# EAGLE board expansion-original (EAGLE 9.6.2)
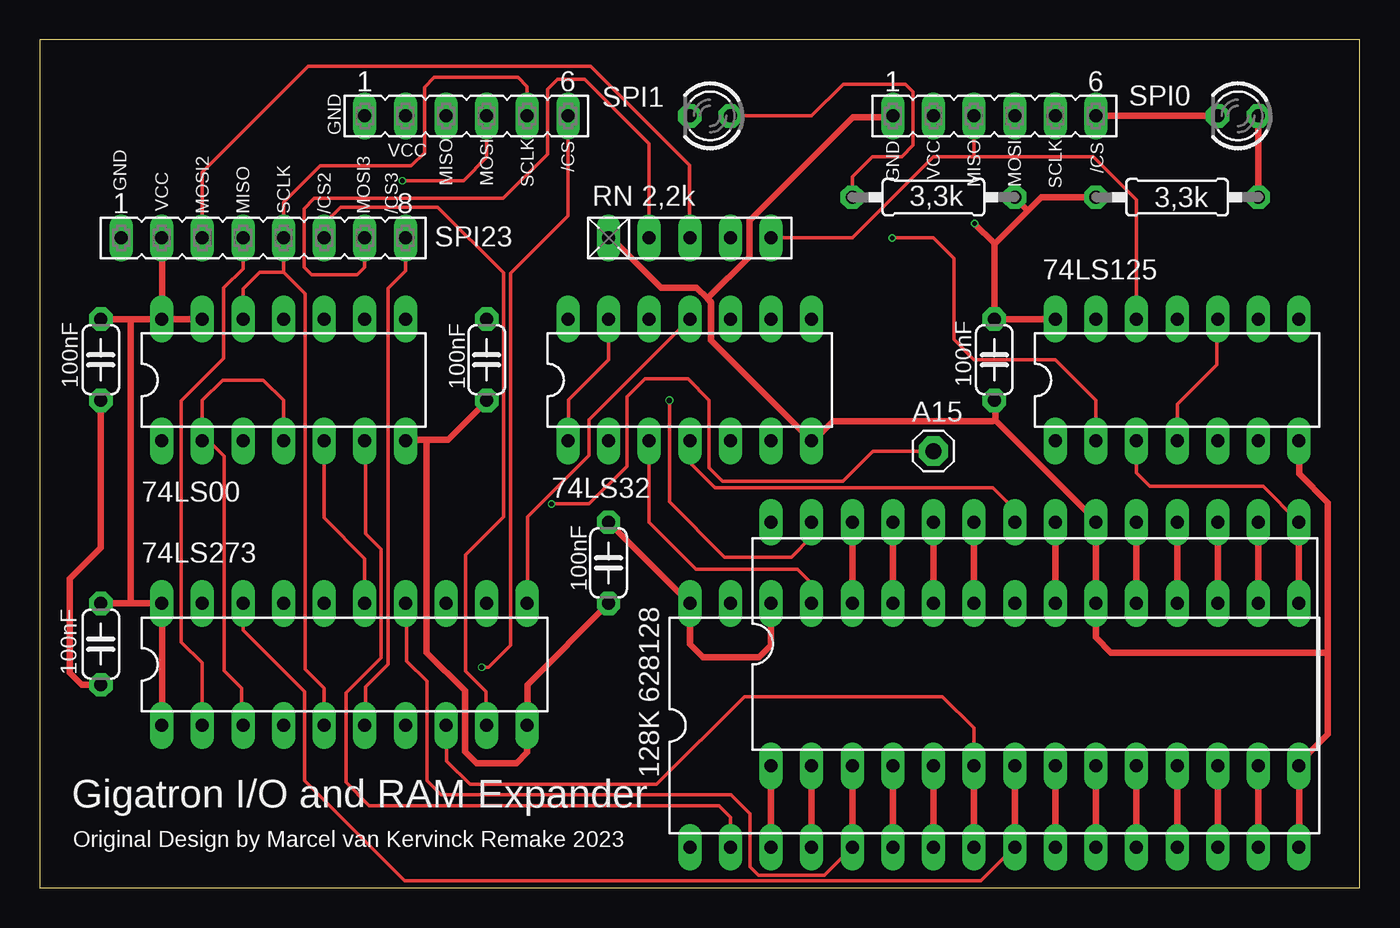
[diagram p0: board, top side]
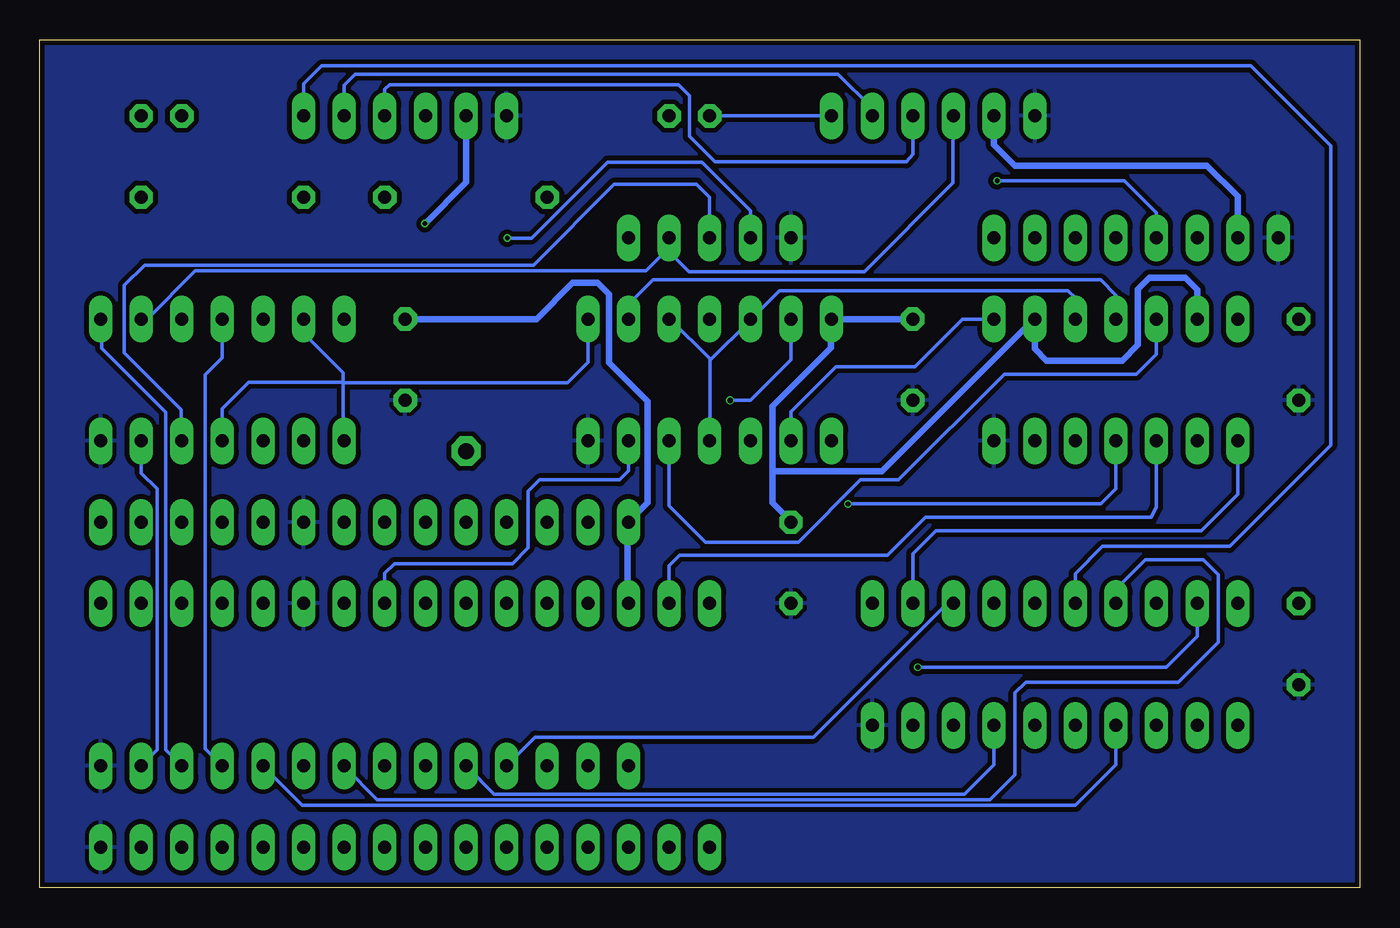
[diagram p1: board, bottom side, seen from below]

Size 82.53 x 53.01 mm. Coordinates in mm from the lower left corner, seen from the top.
Outline: 0,0 82.53,0 82.53,53.01 0,53.01 0,0
Copper layers (1*16): Top 0.035mm / dielectric 1.6mm / Bottom 0.035mm
Design rules "jlcpcb-2layers *": minimum track width 8mil, minimum drill 0.3mm, track to track 6mil, track to pad 6mil, pad to pad 6mil, via to via 6mil, smd to smd 5mil, copper to edge 0.2mm, drill to drill 6mil, minimum pad ring 10mil, minimum via ring 3mil, stop-mask expansion 4mil, vias tented up to drill 0mil, thermal gap 10mil
Net classes: 1 power: width 0.406 mm, clearance 0.203 mm

## Footprints (pad centres in the part's own frame; a part is rotated, then mirrored left to right if it is on the bottom)
1X01 = drill 1.016 octagon: 1 0,0
C050-024X044 = drill 0.813 octagon: 1 -2.54,0; 2 2.54,0
DIL14 = drill 0.813 long: 1 -7.62,-3.81; 2 -5.08,-3.81; 3 -2.54,-3.81; 4 0,-3.81; 5 2.54,-3.81; 6 5.08,-3.81; 7 7.62,-3.81; 8 7.62,3.81; 9 5.08,3.81; 10 2.54,3.81; 11 0,3.81; 12 -2.54,3.81; 13 -5.08,3.81; 14 -7.62,3.81
DIL20 = drill 0.813 long: 1 -11.43,-3.81; 2 -8.89,-3.81; 3 -6.35,-3.81; 4 -3.81,-3.81; 5 -1.27,-3.81; 6 1.27,-3.81; 7 3.81,-3.81; 8 6.35,-3.81; 9 8.89,-3.81; 10 11.43,-3.81; 11 11.43,3.81; 12 8.89,3.81; 13 6.35,3.81; 14 3.81,3.81; 15 1.27,3.81; 16 -1.27,3.81; 17 -3.81,3.81; 18 -6.35,3.81; 19 -8.89,3.81; 20 -11.43,3.81
DIL32 = drill 0.813 long: 1 -19.05,-7.62; 2 -16.51,-7.62; 3 -13.97,-7.62; 4 -11.43,-7.62; 5 -8.89,-7.62; 6 -6.35,-7.62; 7 -3.81,-7.62; 8 -1.27,-7.62; 9 1.27,-7.62; 10 3.81,-7.62; 11 6.35,-7.62; 12 8.89,-7.62; 13 11.43,-7.62; 14 13.97,-7.62; 15 16.51,-7.62; 16 19.05,-7.62; 17 19.05,7.62; 18 16.51,7.62; 19 13.97,7.62; 20 11.43,7.62; 21 8.89,7.62; 22 6.35,7.62; 23 3.81,7.62; 24 1.27,7.62; 25 -1.27,7.62; 26 -3.81,7.62; 27 -6.35,7.62; 28 -8.89,7.62; 29 -11.43,7.62; 30 -13.97,7.62; 31 -16.51,7.62; 32 -19.05,7.62
DIL28-6 = drill 0.813 long: 1 -16.51,-7.62; 2 -13.97,-7.62; 3 -11.43,-7.62; 4 -8.89,-7.62; 5 -6.35,-7.62; 6 -3.81,-7.62; 7 -1.27,-7.62; 8 1.27,-7.62; 9 3.81,-7.62; 10 6.35,-7.62; 11 8.89,-7.62; 12 11.43,-7.62; 13 13.97,-7.62; 14 16.51,-7.62; 15 16.51,7.62; 16 13.97,7.62; 17 11.43,7.62; 18 8.89,7.62; 19 6.35,7.62; 20 3.81,7.62; 21 1.27,7.62; 22 -1.27,7.62; 23 -3.81,7.62; 24 -6.35,7.62; 25 -8.89,7.62; 26 -11.43,7.62; 27 -13.97,7.62; 28 -16.51,7.62
LED3MM = drill 0.813 octagon: A -1.27,0; K 1.27,0
0207/10 = drill 0.813 octagon: 1 -5.08,0; 2 5.08,0
RN-5 = drill 0.813 long: 1 -5.08,0; 2 -2.54,0; 3 0,0; 4 2.54,0; 5 5.08,0
FE06 = drill 0.813 long: 1 -6.35,0; 2 -3.81,0; 3 -1.27,0; 4 1.27,0; 5 3.81,0; 6 6.35,0
FE08 = drill 0.813 long: 1 -8.89,0; 2 -6.35,0; 3 -3.81,0; 4 -1.27,0; 5 1.27,0; 6 3.81,0; 7 6.35,0; 8 8.89,0

## Placement (x,y rotation side)
A15  A15  [1X01]  55.88,27.3 0 top
C1  100nF  [C050-024X044]  3.81,15.24 270 top
C2  100nF  [C050-024X044]  3.81,33.02 270 top
C3  100nF  [C050-024X044]  27.94,33.02 270 top
C4  100nF  [C050-024X044]  59.69,33.02 270 top
C5  100nF  [C050-024X044]  35.56,20.32 270 top
IC1  74LS00N  [DIL14]  15.24,31.75 0 top
IC2  74LS125N  [DIL14]  71.12,31.75 0 top
IC3  74LS32N  [DIL14]  40.64,31.75 0 top
IC4  74HC273N  [DIL20]  19.05,13.97 0 top
IC5  628128  [DIL32]  59.69,10.16 0 top
IC6  adapter  [DIL28-6]  62.23,15.24 0 top
LED1  green  [LED3MM]  74.93,48.26 180 top
LED2  green  [LED3MM]  41.91,48.26 180 top
R1  3,3k  [0207/10]  71.12,43.18 180 top
R2  3,3k  [0207/10]  55.88,43.18 0 top
RN1  2,2k  [RN-5]  40.64,40.64 0 top
SPI0  SPI0  [FE06]  59.69,48.26 0 top
SPI1  SPI1  [FE06]  26.67,48.26 0 top
SPI23  SPI23  [FE08]  13.97,40.64 0 top

## Library data of the parts
A15 = pinhead
C1-C5 = rcl; SPICEPREFIX: C
IC1-IC4 = 74xx-eu
IC5 IC6 = memory-hitachi; OC_FARNELL: unknown; OC_NEWARK: unknown
LED1 LED2 = led
R1 R2 = rcl; SPICEPREFIX: R
RN1 = resistor-net; OC_FARNELL: unknown; OC_NEWARK: unknown
SPI0 SPI1 SPI23 = con-lsta; OC_FARNELL: unknown; OC_NEWARK: unknown

## Nets
/OE: IC1.10 IC3.4 IC3.10 IC3.12 IC6.22
/OE_PORT: IC2.1 IC2.4 IC2.10 IC2.13 IC3.8
/OE_RAM: IC3.6 IC5.24
/SS0: IC4.16 LED1.K SPI0.6
/SS1: IC4.19 LED2.K SPI1.6
/SS2: IC4.9 SPI23.6
/SS3: IC4.6 SPI23.8
/WR: IC3.1 IC3.13 IC6.27
/WR_PORT: IC3.11 IC4.11
/WR_RAM: IC3.3 IC5.29
A0: IC4.4 IC5.12 IC6.10
A1: IC5.11 IC6.9
A2: IC4.17 IC5.10 IC6.8
A3: IC4.18 IC5.9 IC6.7
A4: IC4.8 IC5.8 IC6.6
A5: IC4.7 IC5.7 IC6.5
A6: IC4.13 IC5.6 IC6.4
A7: IC4.14 IC5.5 IC6.3
A8: IC5.27 IC6.25
A9: IC5.26 IC6.24
A10: IC5.23 IC6.21
A11: IC5.25 IC6.23
A12: IC5.4 IC6.2
A13: IC5.28 IC6.26
A14: IC5.3 IC6.1
A15: A15.1 IC1.2 IC1.4 IC4.3
A15_RAM: IC1.3 IC5.31
A16_RAM: IC1.6 IC5.2
B0: IC1.1 IC4.12
B1: IC1.5 IC4.15
D0: IC2.11 IC5.13 IC6.11
D1: IC2.8 IC5.14 IC6.12
D2: IC2.6 IC5.15 IC6.13
D3: IC2.3 IC5.17 IC6.15
D4: IC5.18 IC6.16
D5: IC5.19 IC6.17
D6: IC5.20 IC6.18
D7: IC5.21 IC6.19
GND [power]: C1.2 C2.2 C3.2 C4.2 C5.2 IC1.7 IC2.7 IC3.7 IC4.10 IC5.16 IC5.22 IC6.14 IC6.20 RN1.1 SPI0.1 SPI1.1 SPI23.1
MISO0: IC2.12 RN1.5 SPI0.3
MISO1: IC2.9 RN1.4 SPI1.3
MISO2: IC2.5 RN1.3 SPI23.3
MISO3: IC2.2 RN1.2 SPI23.7
MOSI: IC4.2 SPI0.4 SPI1.4 SPI23.4
N$1: IC1.8 IC3.2
N$2: LED1.A R1.1
N$3: IC1.11 IC3.9
N$4: LED2.A R2.1
SCLK: IC1.12 IC3.5 IC4.5 SPI0.5 SPI1.5 SPI23.5
VCC [power]: C1.1 C2.1 C3.1 C4.1 C5.1 IC1.9 IC1.13 IC1.14 IC2.14 IC3.14 IC4.1 IC4.20 IC5.30 IC5.32 IC6.28 R1.2 R2.2 SPI0.2 SPI1.2 SPI23.2

## Tracks (layer width: path | path; a pad name or v marks a point on that pad's centre or on a via)
/OE
  Top 0.203: IC6.22 60.96,23.65 59.61,25 42.23,25 40.64,26.59 IC3.4
  Bottom 0.203: IC1.10 17.78,36.88 18.24,37.34 36.27,37.34 38.05,35.56 IC3.12 38.14,35.47 40.63,32.98 | 40.63,32.98 40.63,28 IC3.4 | IC3.10 43.12,35.56 40.63,33.07 40.63,32.98
/OE_PORT
  Top 0.203: IC2.10 73.61,35.56 73.61,32.72 71.12,30.23 IC2.4
  Bottom 0.203: 63.56,31.6 63.56,32.21 66.04,34.68 IC2.13 | 63.56,31.6 63.56,31.57 | 63.56,31.57 63.56,28 IC2.1 | 63.56,31.57 49.55,31.57 48.26,32.86 IC3.8 | IC2.4 71.12,29.94 69.46,31.6 63.56,31.6
/OE_RAM
  Bottom 0.203: IC5.24 60.96,19.67 60.36,20.28 52.98,20.28 51.99,21.27 51.99,24.8 51.28,25.5 46.29,25.5 45.72,26.07 IC3.6
/SS0
  Top 0.406: LED1.K SPI0.6
  Bottom 0.203: IC4.16 17.78,19.65 16.08,21.35 8.12,21.35 1.8,27.67 1.8,46.41 6.79,51.4 64.9,51.4 66.04,50.26 SPI0.6
/SS1  (via drill 0.3)
  Top 0.203: v27.63,13.79 28.05,13.79 29.43,15.16 29.43,38.44 33.02,42.03 SPI1.6
  Bottom 0.203: IC4.19 10.16,15.73 12.1,13.79 v27.63,13.79 | SPI1.6 LED2.K
/SS2
  Top 0.203: SPI23.6 17.78,41.54 18.8,42.56 24.88,42.56 28.98,38.46 28.98,23.2 26.62,20.84 26.62,13.55 27.91,12.26 27.91,10.22 IC4.9
/SS3
  Top 0.203: SPI23.8 22.86,38.58 21.78,37.5 21.78,13.99 20.36,12.57 20.36,10.22 IC4.6
/WR  (via drill 0.35)
  Top 0.203: IC3.13 35.56,33.02 33.07,30.53 33.07,28 IC3.1 | IC6.27 48.26,21.95 46.99,20.68 42.82,20.68 39.37,24.13 v39.37,30.48
  Bottom 0.203: IC3.13 35.56,33.02 38.1,30.48 v39.37,30.48
/WR_PORT
  Top 0.203: IC4.11 30.49,17.78 30.49,23.2 34.33,27.05 34.33,29.27 40.63,35.56 IC3.11
/WR_RAM
  Top 0.203: IC5.29 48.26,19.05 47.39,19.92 41.04,19.92 38.1,22.86 IC3.3
A0
  Top 0.406: IC6.10 IC5.12
  Bottom 0.203: IC4.4 15.24,7.68 17.77,5.16 66.14,5.16 68.54,7.56 IC6.10
A1
  Top 0.406: IC6.9 IC5.11
A2
  Top 0.406: IC6.8 IC5.10
  Bottom 0.203: IC4.17 15.24,18.66 13.39,20.51 9.78,20.51 8.84,19.57 8.84,15.35 11.33,12.87 20.87,12.87 21.55,12.19 21.55,7.07 23.11,5.51 61.43,5.51 63.48,7.56 IC6.8
A3
  Top 0.203: IC4.18 12.71,17.78 12.71,16.09 16.55,12.25 16.55,6.69 22.8,0.45 58.85,0.45 60.9,2.49 IC5.9
  Top 0.406: IC6.7 60.96,2.55 60.9,2.49
A4
  Top 0.203: IC6.6 58.42,9.99 56.45,11.96 44.07,11.96 38.57,6.46 26.89,6.46 25.43,7.92 25.43,10.13 IC4.8
  Top 0.406: IC6.6 IC5.8
A5
  Top 0.406: IC6.5 IC5.7
  Bottom 0.203: IC4.7 22.86,7.71 24.7,5.87 54.14,5.87 55.83,7.56 IC6.5
A6
  Top 0.406: IC6.4 IC5.6
  Bottom 0.203: IC4.13 25.78,17.78 34.14,9.42 51.56,9.42 53.34,7.64 IC6.4
A7
  Top 0.203: IC4.14 22.94,17.78 22.94,14.17 24.2,12.91 24.2,6.69 25.07,5.81 43.22,5.81 44.4,4.63 44.4,1.33 44.93,0.8 49.07,0.8 50.76,2.49 IC5.5
  Top 0.406: IC6.3 IC5.5
A8
  Top 0.406: IC6.25 IC5.27
A9
  Top 0.406: IC6.24 IC5.26
A10
  Top 0.406: IC6.21 IC5.23
A11
  Top 0.406: IC6.23 IC5.25
A12
  Top 0.406: IC6.2 IC5.4
A13
  Top 0.406: IC6.26 IC5.28
A14
  Top 0.406: IC6.1 IC5.3
A15  (via drill 0.3)
  Top 0.203: IC4.3 12.62,10.22 12.62,12.47 11.52,13.58 11.52,26.98 10.58,27.91 IC1.2 10.16,30.48 11.43,31.75 13.97,31.75 15.24,30.48 IC1.4 | v32,24 34.34,24 36.71,26.37 36.71,30.69 37.85,31.84 40.52,31.84 41.85,30.5 41.85,26.26 42.69,25.42 50.23,25.42 52.09,27.29 55.83,27.29 A15.1
  Bottom 0.203: v32,24 16.19,24 15.24,24.95 IC1.4
A15_RAM
  Bottom 0.203: IC5.31 43.18,20.15 42.54,20.79 29.53,20.79 27.15,23.17 13.02,23.17 12.7,23.81 IC1.3
A16_RAM
  Top 0.203: IC5.2 43.18,4.42 42.46,5.14 20.59,5.14 19.13,6.6 19.13,12.2 21.34,14.4 21.34,21.16 20.36,22.14 20.36,27.91 IC1.6
B0
  Bottom 0.203: IC4.12 27.94,20.89 26.49,22.34 9.89,22.34 7.62,24.61 IC1.1
B1
  Top 0.203: IC1.5 17.78,23.13 20.32,20.59 IC4.15
D0
  Top 0.406: IC6.11 IC5.13
  Bottom 0.203: IC2.11 71.12,33.15 72.19,32.09 72.19,8.71 71.12,7.64 IC6.11
D1
  Top 0.406: IC6.12 IC5.14
  Bottom 0.203: IC2.8 78.68,35.56 78.68,33.74 74.68,29.74 74.68,8.62 73.7,7.64 IC6.12
D2
  Top 0.406: IC6.13 IC5.15
  Bottom 0.203: IC2.6 76.19,27.91 76.19,25.93 75.21,24.96 75.21,8.62 76.19,7.64 IC6.13
D3
  Top 0.203: IC2.3 68.58,25.94 69.42,25.1 76.51,25.1 78.68,22.94 IC6.15
  Top 0.406: IC6.15 IC5.17
D4
  Top 0.406: IC6.16 IC5.18
D5
  Top 0.406: IC6.17 IC5.19
D6
  Top 0.406: IC6.18 IC5.20
D7
  Top 0.406: IC6.19 IC5.21
GND
  Top 0.406: C5.2 30.49,12.71 30.49,10.22 IC4.10 30.48,8.46 29.81,7.79 27.31,7.79 26.58,8.52 26.58,12.31 24.18,14.71 24.18,28 | 24.18,28 25.51,28 27.91,30.4 C3.2 | 24.18,28 22.94,28 IC1.7 | C1.2 2.61,12.7 1.87,13.44 1.87,19.34 3.81,21.27 C2.2 | IC5.16 78.77,2.58 78.77,7.56 IC6.14 78.77,7.82 80.56,9.61 80.56,14.71 | 80.56,14.71 80.56,24.09 78.77,25.88 78.77,27.91 IC2.7 | 59.74,29.25 59.74,30.4 C4.2 | 59.74,29.25 65.96,23.02 IC6.20 66.05,22.85 66.05,17.78 IC5.22 66.04,15.66 66.99,14.71 80.56,14.71 | 41.74,36.85 41.96,36.63 41.96,34.23 48.18,28 IC3.7 48.45,28 49.61,29.16 59.56,29.16 59.74,29.25 | 41.74,36.85 41.07,37.52 38.85,37.52 35.74,40.63 35.56,40.63 RN1.1 | 41.74,36.85 44.36,39.47 44.36,41.69 50.85,48.18 53.34,48.18 SPI0.1
  pour Bottom (isolate 0.305): 0,53.34 0,0 82.55,0 82.55,53.34
MISO0
  Top 0.203: RN1.5 50.8,40.64 55.88,45.72 58.42,45.72 | 58.42,45.72 65.88,45.72 68.58,43.02 IC2.12 | SPI0.3 58.42,45.72
MISO1
  Bottom 0.203: SPI1.3 25.43,48.18 25.43,44.07 30.96,38.53 41.94,38.53 43.18,39.78 RN1.4 43.18,40.02 44.62,38.58 72.81,38.58 75.83,35.56 IC2.9
MISO2
  Top 0.203: SPI23.3 10.16,44.74 16.78,51.36 34.45,51.36 40.63,45.18 40.63,40.72 RN1.3
  Bottom 0.203: RN1.3 40.64,43.18 41.45,43.99 46.62,43.99 51.67,38.94 75.98,38.94 77.25,37.67 77.25,33.45 73.7,29.9 73.7,28 IC2.5
MISO3  (via drill 0.3)
  Top 0.203: IC2.2 66.04,30.48 63.5,33.02 58.42,33.02 57.15,34.29 57.15,39.37 55.88,40.64 53.32,40.64 v53.3,40.62 | SPI23.7 20.32,38.81 19.84,38.34 16.99,38.34 16.51,38.81 16.51,42.47 17.14,43.1 28.97,43.1 31.75,45.88 31.75,49.93 32.38,50.56 34.05,50.56 38.1,46.51 RN1.2
  Bottom 0.203: v53.3,40.62 51.79,40.62 47.03,45.38 41.13,45.38 38.1,42.34 RN1.2
MOSI  (via drill 0.3)
  Top 0.203: SPI23.4 12.7,38.72 11.49,37.51 11.49,33.1 8.84,30.45 8.84,15.35 10.13,14.06 10.13,10.22 IC4.2 | v22.67,44.21 26.48,44.21 27.94,45.67 SPI1.4
  Bottom 0.203: v22.67,44.21 14.7,44.21 12.7,42.21 SPI23.4 | SPI0.4 60.96,49.92 60.67,50.21 42.59,50.21 41.91,49.53 41.91,46.99 40.3,45.38 28.34,45.38 27.94,45.86 SPI1.4
N$1
  Bottom 0.203: IC3.2 35.56,29.78 32.75,32.59 27.81,32.59 24.84,35.56 IC1.8
N$2
  Top 0.406: LED1.A R1.1
N$3
  Bottom 0.203: IC1.11 15.24,37.06 16.19,38.01 44.2,38.01 45.72,36.49 IC3.9
N$4
  Top 0.203: R2.1 50.8,44.45 52.07,45.72 53.9,45.72 54.61,46.43 54.61,49.77 54.13,50.24 50.24,50.24 48.26,48.26 LED2.A
SCLK
  Top 0.203: IC4.5 17.78,12.47 16.59,13.66 16.59,37.15 15.24,38.49 | IC1.12 12.7,37.47 13.73,38.49 15.24,38.49 | 15.24,38.49 SPI23.5 15.24,42.85 17.53,45.14 23.2,45.14 24.04,45.97 24.04,50.06 24.66,50.69 29.9,50.69 30.48,50.1 SPI1.5
  Bottom 0.203: SPI0.5 63.5,50.19 62.81,50.88 32.63,50.88 30.48,48.74 SPI1.5 | IC3.5 43.18,23.89 40.91,21.62 35.1,21.62 31.2,25.51 28.83,25.51 22.23,32.12 13.95,32.12 12.71,33.35 12.71,35.56 IC1.12
VCC  (via drill 0.3)
  Top 0.406: 5.69,17.78 IC4.20 7.64,17.6 7.64,10.22 IC4.1 | 5.69,17.78 C1.1 | IC1.14 5.69,35.56 | 5.69,35.56 C2.1 | IC1.14 IC1.13 | SPI23.2 7.64,40.63 7.64,35.74 IC1.14 | 5.69,35.56 5.69,17.78 | IC2.14 C4.1 59.69,40.3 | v58.46,41.53 59.69,40.3 | 59.69,40.3 59.72,40.27 61.79,42.35 | C5.1 35.56,22.85 40.63,17.78 IC5.32 40.64,15.24 41.46,14.42 44.98,14.42 45.72,15.16 IC5.30 | 61.79,42.35 62.63,43.18 R1.2 | R2.2 61.79,42.35
  Bottom 0.406: IC1.13 10.16,37.4 10.91,38.15 13.16,38.15 13.87,37.44 13.87,33.95 14.85,32.97 19.58,32.97 20.32,33.71 IC1.9 20.45,35.47 29.87,26.05 36.72,26.05 | SPI1.2 22.86,46.47 21.55,45.16 9.55,45.16 7.62,43.23 SPI23.2 | v58.46,41.53 55.88,44.11 SPI0.2 | IC5.30 45.78,17.78 45.78,22.85 IC6.28 45.61,23.02 44.54,24.09 44.54,30.43 46.94,32.83 46.94,37.1 47.67,37.83 49.21,37.83 51.48,35.56 C4.1 | C3.1 IC3.14 33.07,35.38 33.07,33.76 36.72,30.11 36.72,26.05 | 36.72,26.05 36.72,24.09 35.56,22.94 C5.1

## Text on the board
tPlace: SPI1 | SPI0 | GND | VCC | /CS | /CS | GND | MISO | MOSI | SCLK | GND | VCC | MISO | MOSI | SCLK | RN 2,2k | 3,3k | 3,3k | VCC | MOSI2 | MISO | SCLK | /CS2 | MOSI3 | /CS3 | SPI23 | 74LS125 | 100nF | 100nF | 100nF | 74LS00 | 74LS32 | 74LS273 | 100nF | 100nF | 128K 628128 | Gigatron I/O and RAM Expander | Original Design by Marcel van Kervinck Remake 2023